# Altium PCB PCI_HIT_carrier.PcbDoc (part 2 of 2)
Units mm, origin at the board's own origin, x right, y up, seen from the top; angles counter-clockwise.
Board outline 51.3 x 50.35 mm, 4 copper layers (Top Layer, HV_vss, vdd_gnd, Bottom Layer); 9 components, 93 nets, 190 pads, 124 vias.
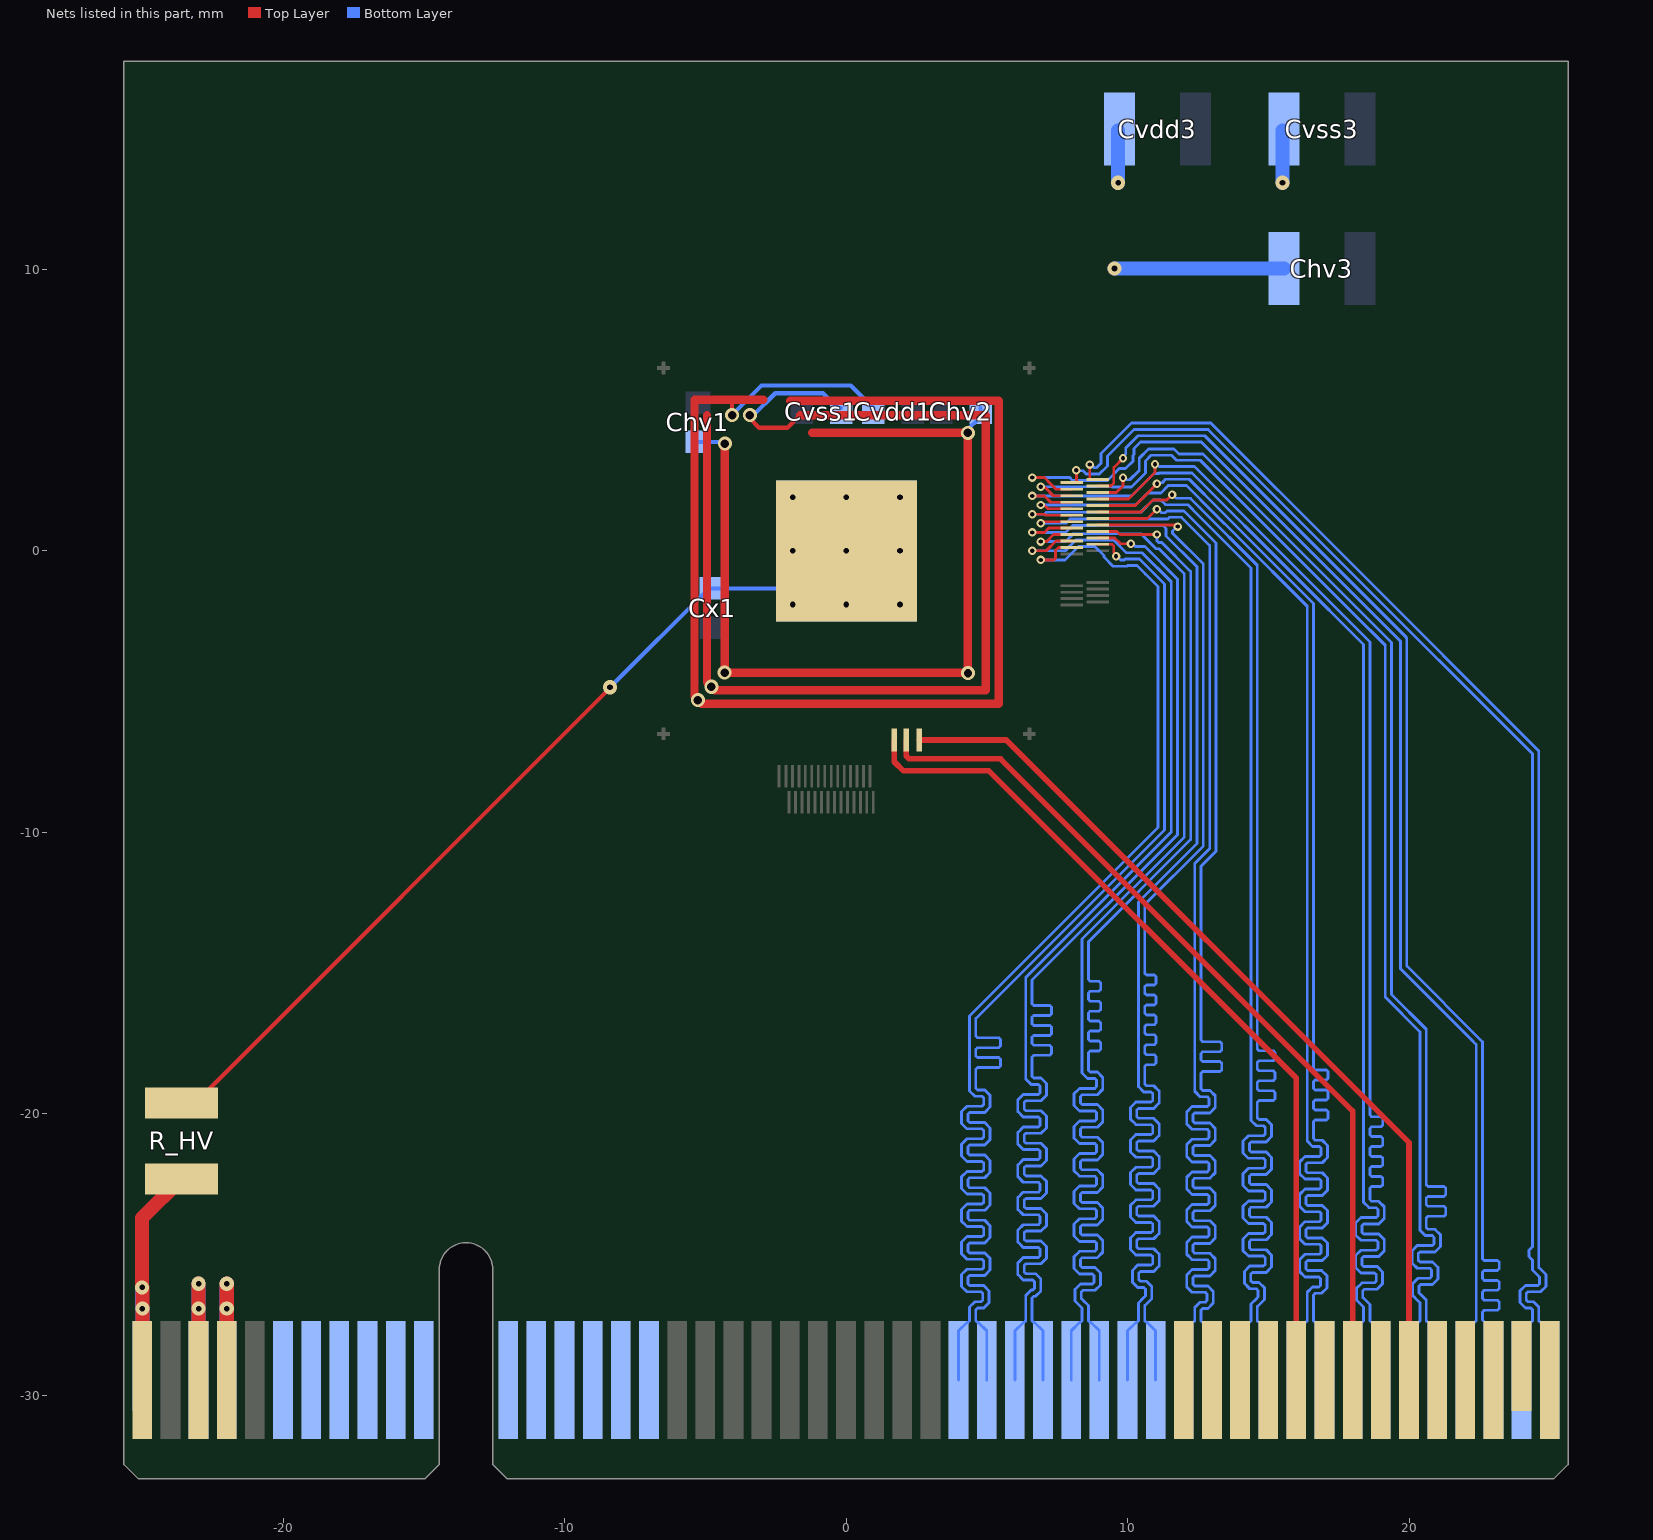
[diagram p4: the nets of this part, all layers, seen from the top]

## Via types
v1: diameter 0.3, hole 0.15, Top Layer to Bottom Layer, 88 vias
v2: diameter 0.5, hole 0.2, Top Layer to Bottom Layer, 22 vias
v3: diameter 0.5, hole 0.3, Top Layer to Bottom Layer, 10 vias
v4: diameter 3.4, hole 3.1, Top Layer to Bottom Layer, 4 vias

## Nets (pads, with @x,y where several pads share a name; then routed paths per layer and width w, separated by ;. In a path a pad name is that pad's centre, name@x,y a point inside that pad or via, vN(x,y) a via of type N, cw(c..) or ccw(c..) an arc to the next point about the centre after c; other vN are vias at no path point) (continued)
H6_N: pad.A28 pad.B15@8,0.12 | length 46
  Top Layer w0.1: v1(6.9,-0.319) 7.366,-0.319 7.425,-0.261 7.425,0.012 7.533,0.12 pad.B15@8,0.12
  Bottom Layer w0.1: pad.A28@3.985,-29.456 3.985,-27.706 4.285,-27.406 4.314,-27.406 4.372,-27.347 4.372,-27.189 4.372,-26.948 4.372,-26.867 4.564,-26.675 4.786,-26.675 4.846,-26.614 4.846,-26.381 4.786,-26.321 4.281,-26.321 4.089,-26.129 4.089,-25.709 4.281,-25.517 4.82,-25.517 4.88,-25.456 4.88,-25.223 4.82,-25.163 4.281,-25.163 4.089,-24.971 4.089,-24.551 4.281,-24.359 4.82,-24.359 4.88,-24.298 4.88,-24.065 4.82,-24.005 4.281,-24.005 4.089,-23.813 4.089,-23.393 4.281,-23.201 4.82,-23.201 4.88,-23.14 4.88,-22.907 4.82,-22.847 4.281,-22.847 4.089,-22.655 4.089,-22.235 4.281,-22.043 4.82,-22.043 4.88,-21.982 4.88,-21.749 4.82,-21.689 4.281,-21.689 4.089,-21.497 4.089,-21.077 4.281,-20.885 4.82,-20.885 4.88,-20.824 4.88,-20.591 4.82,-20.531 4.281,-20.531 4.089,-20.339 4.089,-19.919 4.281,-19.727 4.82,-19.727 4.88,-19.666 4.88,-19.433 4.82,-19.373 4.564,-19.373 4.372,-19.181 4.372,-18.972 4.372,-18.262 4.372,-16.52 11.072,-9.82 11.072,-1.268 10.619,-0.814 10.322,-0.517 9.997,-0.517 9.972,-0.542 9.472,-0.542 9.147,-0.218 9.147,-0.164 8.823,0.16 8.247,0.16 7.767,-0.319 v1(6.9,-0.319)
H6_P: pad.A29 pad.B15@8.925,0.235 | length 46
  Top Layer w0.1: pad.B15@8.925,0.235 9.441,0.235 9.5,0.176 9.5,-0.057 9.58,-0.137 v1(9.58,-0.191)
  Bottom Layer w0.1: pad.A29@4.985,-29.456 4.985,-27.706 4.685,-27.406 4.656,-27.406 4.597,-27.347 4.597,-27.189 4.597,-27.041 4.597,-26.96 4.658,-26.9 4.879,-26.9 5.071,-26.708 5.071,-26.288 4.879,-26.096 4.375,-26.096 4.314,-26.035 4.314,-25.802 4.375,-25.742 4.914,-25.742 5.105,-25.55 5.105,-25.13 4.914,-24.938 4.375,-24.938 4.314,-24.877 4.314,-24.644 4.375,-24.584 4.914,-24.584 5.105,-24.392 5.105,-23.972 4.914,-23.78 4.375,-23.78 4.314,-23.719 4.314,-23.486 4.375,-23.426 4.914,-23.426 5.105,-23.234 5.105,-22.814 4.914,-22.622 4.375,-22.622 4.314,-22.561 4.314,-22.328 4.375,-22.268 4.914,-22.268 5.105,-22.076 5.105,-21.656 4.914,-21.464 4.375,-21.464 4.314,-21.403 4.314,-21.17 4.375,-21.11 4.914,-21.11 5.105,-20.918 5.105,-20.498 4.914,-20.306 4.375,-20.306 4.314,-20.245 4.314,-20.012 4.375,-19.952 4.914,-19.952 5.105,-19.76 5.105,-19.34 4.914,-19.148 4.658,-19.148 4.597,-19.087 4.597,-18.972 4.597,-18.819 4.597,-18.415 4.658,-18.355 5.409,-18.355 5.47,-18.295 5.47,-18.061 5.409,-18.001 4.658,-18.001 4.597,-17.941 4.597,-17.707 4.658,-17.647 5.409,-17.647 5.47,-17.587 5.47,-17.353 5.409,-17.293 4.658,-17.293 4.597,-17.233 4.597,-16.972 4.597,-16.613 11.297,-9.913 11.297,-1.174 10.415,-0.292 9.904,-0.292 9.878,-0.317 9.739,-0.317 9.613,-0.191 v1(9.58,-0.191)
H7_N: pad.A30 pad.B7@8,0.35 | length 46
  Top Layer w0.1: v1(6.601,0.006) 7.1,0.006 7.444,0.35 pad.B7@8,0.35
  Bottom Layer w0.1: pad.A30@5.985,-29.456 5.985,-27.706 6.285,-27.406 6.314,-27.406 6.372,-27.347 6.372,-26.944 6.372,-26.85 6.372,-26.447 6.564,-26.255 6.622,-26.255 6.682,-26.195 6.682,-25.961 6.622,-25.901 6.281,-25.901 6.089,-25.709 6.089,-25.289 6.281,-25.097 6.82,-25.097 6.88,-25.037 6.88,-24.803 6.82,-24.743 6.281,-24.743 6.089,-24.551 6.089,-24.131 6.281,-23.939 6.82,-23.939 6.88,-23.879 6.88,-23.645 6.82,-23.585 6.281,-23.585 6.089,-23.393 6.089,-22.973 6.281,-22.781 6.82,-22.781 6.88,-22.721 6.88,-22.487 6.82,-22.427 6.281,-22.427 6.089,-22.235 6.089,-21.815 6.281,-21.623 6.82,-21.623 6.88,-21.563 6.88,-21.329 6.82,-21.269 6.281,-21.269 6.089,-21.077 6.089,-20.657 6.281,-20.465 6.82,-20.465 6.88,-20.405 6.88,-20.171 6.82,-20.111 6.281,-20.111 6.089,-19.919 6.089,-19.499 6.281,-19.307 6.82,-19.307 6.88,-19.247 6.88,-19.013 6.82,-18.953 6.564,-18.953 6.372,-18.761 6.372,-18.552 6.372,-15.156 11.538,-9.991 11.538,-1.097 10.508,-0.067 9.95,-0.067 9.498,0.385 8.153,0.385 7.774,0.006 v1(6.601,0.006)
H7_P: pad.A31 pad.B7@8.925,0.465 | length 46
  Top Layer w0.1: pad.B7@8.925,0.465 9.53,0.465 9.737,0.258 v1(10.107,0.258)
  Bottom Layer w0.1: pad.A31@6.985,-29.456 6.985,-27.706 6.685,-27.406 6.656,-27.406 6.597,-27.347 6.597,-26.944 6.598,-26.54 6.658,-26.48 6.715,-26.48 6.907,-26.288 6.907,-25.868 6.715,-25.676 6.375,-25.676 6.314,-25.616 6.314,-25.382 6.375,-25.322 6.914,-25.322 7.106,-25.13 7.106,-24.71 6.914,-24.518 6.375,-24.518 6.314,-24.458 6.314,-24.224 6.375,-24.164 6.914,-24.164 7.106,-23.972 7.106,-23.552 6.914,-23.36 6.375,-23.36 6.314,-23.3 6.314,-23.066 6.375,-23.006 6.914,-23.006 7.106,-22.814 7.106,-22.394 6.914,-22.202 6.375,-22.202 6.314,-22.142 6.314,-21.908 6.375,-21.848 6.914,-21.848 7.106,-21.656 7.106,-21.236 6.914,-21.044 6.375,-21.044 6.314,-20.984 6.314,-20.75 6.375,-20.69 6.914,-20.69 7.106,-20.498 7.106,-20.078 6.914,-19.886 6.375,-19.886 6.314,-19.826 6.314,-19.592 6.375,-19.532 6.914,-19.532 7.106,-19.34 7.106,-18.92 6.914,-18.728 6.658,-18.728 6.598,-18.668 6.598,-18.552 6.598,-18.383 6.598,-17.979 6.658,-17.918 7.225,-17.918 7.285,-17.858 7.285,-17.625 7.225,-17.564 6.658,-17.564 6.598,-17.504 6.598,-17.271 6.658,-17.21 7.225,-17.21 7.285,-17.15 7.285,-16.917 7.225,-16.856 6.658,-16.856 6.598,-16.796 6.598,-16.563 6.658,-16.502 7.225,-16.502 7.285,-16.442 7.285,-16.209 7.225,-16.148 6.658,-16.148 6.598,-16.088 6.598,-15.956 6.598,-15.249 11.763,-10.084 11.763,-1.004 10.601,0.158 10.261,0.158 10.161,0.258 v1(10.107,0.258)
H8_N: pad.A32 pad.B11@8,0.58 | length 46
  Top Layer w0.1: v1(6.9,0.331) 6.909,0.34 7.116,0.34 7.356,0.58 pad.B11@8,0.58
  Bottom Layer w0.1: v1(6.9,0.331) 7.781,0.331 8.06,0.61 10.467,0.61 10.998,0.079 11.108,0.079 12.005,-0.818 12.005,-10.16 8.372,-13.793 8.372,-17.971 8.372,-18.337 8.372,-18.546 8.564,-18.738 8.82,-18.738 8.88,-18.799 8.88,-19.032 8.82,-19.092 8.281,-19.092 8.089,-19.284 8.089,-19.704 8.281,-19.896 8.82,-19.896 8.88,-19.957 8.88,-20.19 8.82,-20.25 8.281,-20.25 8.089,-20.442 8.089,-20.862 8.281,-21.054 8.82,-21.054 8.88,-21.115 8.88,-21.348 8.82,-21.408 8.281,-21.408 8.089,-21.6 8.089,-22.02 8.281,-22.212 8.82,-22.212 8.88,-22.273 8.88,-22.506 8.82,-22.566 8.281,-22.566 8.089,-22.758 8.089,-23.178 8.281,-23.37 8.82,-23.37 8.88,-23.431 8.88,-23.664 8.82,-23.724 8.281,-23.724 8.089,-23.916 8.089,-24.336 8.281,-24.528 8.82,-24.528 8.88,-24.589 8.88,-24.822 8.82,-24.882 8.281,-24.882 8.089,-25.074 8.089,-25.494 8.281,-25.686 8.738,-25.686 8.799,-25.747 8.799,-25.98 8.738,-26.04 8.312,-26.04 8.12,-26.232 8.12,-26.652 8.312,-26.844 8.372,-26.905 8.372,-27.164 8.372,-27.347 8.314,-27.406 8.285,-27.406 7.985,-27.706 pad.A32@7.985,-29.456
H8_P: pad.A33 pad.B11@8.925,0.695 | length 46
  Top Layer w0.1: pad.B11@8.925,0.695 9.618,0.695 9.729,0.584 v1(11.03,0.584)
  Bottom Layer w0.1: 8.405,-26.619 8.345,-26.559 8.345,-26.326 8.405,-26.265 8.832,-26.265 9.024,-26.073 9.024,-25.653 8.832,-25.461 8.375,-25.461 8.314,-25.401 8.314,-25.168 8.375,-25.107 8.914,-25.107 9.105,-24.915 9.105,-24.495 8.914,-24.303 8.375,-24.303 8.314,-24.243 8.314,-24.01 8.375,-23.949 8.914,-23.949 9.105,-23.757 9.105,-23.337 8.914,-23.145 8.375,-23.145 8.314,-23.085 8.314,-22.852 8.375,-22.791 8.914,-22.791 9.105,-22.599 9.105,-22.179 8.914,-21.987 8.375,-21.987 8.314,-21.927 8.314,-21.694 8.375,-21.633 8.914,-21.633 9.105,-21.441 9.105,-21.021 8.914,-20.829 8.375,-20.829 8.314,-20.769 8.314,-20.536 8.375,-20.475 8.914,-20.475 9.105,-20.283 9.105,-19.863 8.914,-19.671 8.375,-19.671 8.314,-19.611 8.314,-19.378 8.375,-19.317 8.914,-19.317 9.105,-19.125 9.105,-18.705 8.914,-18.513 8.658,-18.513 8.597,-18.453 8.597,-18.337 8.597,-18.231 8.597,-17.827 8.658,-17.767 8.972,-17.767 9.032,-17.707 9.032,-17.473 8.972,-17.413 8.658,-17.413 8.597,-17.353 8.597,-17.119 8.658,-17.059 8.972,-17.059 9.032,-16.999 9.032,-16.765 8.972,-16.705 8.658,-16.705 8.597,-16.645 8.597,-16.411 8.658,-16.351 8.972,-16.351 9.032,-16.291 9.032,-16.057 8.972,-15.997 8.658,-15.997 8.597,-15.937 8.597,-15.703 8.658,-15.643 8.972,-15.643 9.032,-15.583 9.032,-15.349 8.972,-15.289 8.658,-15.289 8.597,-15.229 8.597,-15.127 8.597,-13.886 12.23,-10.253 12.23,-0.725 11.201,0.304 11.092,0.304 11.033,0.363 11.033,0.581 v1(11.03,0.584) ; 8.406,-26.619 8.597,-26.811 8.597,-27.164 8.597,-27.347 8.656,-27.406 8.685,-27.406 8.985,-27.706 pad.A33@8.985,-29.456
H9_N: pad.A34 pad.B15@8,0.81 | length 46
  Top Layer w0.1: v1(6.601,0.656) 7.035,0.656 7.189,0.81 pad.B15@8,0.81
  Bottom Layer w0.1: v1(6.601,0.656) 7.788,0.656 8.041,0.909 11.244,0.909 11.355,0.798 11.355,0.536 12.455,-0.563 12.455,-10.392 10.372,-12.474 10.372,-18.824 10.372,-19.033 10.564,-19.225 10.826,-19.225 10.886,-19.285 10.886,-19.519 10.826,-19.579 10.281,-19.579 10.089,-19.771 10.089,-20.191 10.281,-20.383 10.826,-20.383 10.886,-20.443 10.886,-20.677 10.826,-20.737 10.281,-20.737 10.089,-20.929 10.089,-21.349 10.281,-21.541 10.826,-21.541 10.886,-21.601 10.886,-21.835 10.826,-21.895 10.281,-21.895 10.089,-22.087 10.089,-22.507 10.281,-22.699 10.826,-22.699 10.886,-22.759 10.886,-22.993 10.826,-23.053 10.281,-23.053 10.089,-23.245 10.089,-23.665 10.281,-23.857 10.826,-23.857 10.886,-23.917 10.886,-24.151 10.826,-24.211 10.281,-24.211 10.089,-24.403 10.089,-24.823 10.281,-25.015 10.826,-25.015 10.886,-25.075 10.886,-25.309 10.826,-25.369 10.352,-25.369 10.16,-25.561 10.16,-25.981 10.352,-26.173 10.564,-26.173 10.625,-26.233 10.625,-26.467 10.564,-26.527 ; pad.A34@9.985,-29.456 9.985,-27.706 10.285,-27.406 10.314,-27.406 10.372,-27.347 10.372,-27.14 10.372,-26.719 10.564,-26.527
H9_P: pad.A35 pad.B15@8.925,0.925 | length 46
  Top Layer w0.1: pad.B15@8.925,0.925 11.756,0.925 11.77,0.912 v1(11.77,0.864)
  Bottom Layer w0.1: pad.A35@10.985,-29.456 10.985,-27.706 10.685,-27.406 10.656,-27.406 10.597,-27.347 10.597,-27.14 10.597,-26.812 10.658,-26.752 10.85,-26.56 10.85,-26.14 10.658,-25.948 10.445,-25.948 10.385,-25.888 10.385,-25.654 10.445,-25.594 10.919,-25.594 11.111,-25.402 11.111,-24.982 10.919,-24.79 10.375,-24.79 10.314,-24.73 10.314,-24.496 10.375,-24.436 10.919,-24.436 11.111,-24.244 11.111,-23.824 10.919,-23.632 10.375,-23.632 10.314,-23.572 10.314,-23.338 10.375,-23.278 10.919,-23.278 11.111,-23.086 11.111,-22.666 10.919,-22.474 10.375,-22.474 10.314,-22.414 10.314,-22.18 10.375,-22.12 10.919,-22.12 11.111,-21.928 11.111,-21.508 10.919,-21.316 10.375,-21.316 10.314,-21.256 10.314,-21.022 10.375,-20.962 10.919,-20.962 11.111,-20.77 11.111,-20.35 10.919,-20.158 10.375,-20.158 10.314,-20.098 10.314,-19.864 10.375,-19.804 10.919,-19.804 11.111,-19.612 11.111,-19.192 10.919,-19 10.658,-19 10.597,-18.94 10.597,-18.824 10.597,-18.715 10.597,-18.311 10.658,-18.251 10.939,-18.251 10.999,-18.191 10.999,-17.957 10.939,-17.897 10.658,-17.897 10.597,-17.837 10.597,-17.603 10.658,-17.543 10.939,-17.543 10.999,-17.483 10.999,-17.249 10.939,-17.189 10.658,-17.189 10.597,-17.129 10.597,-16.895 10.658,-16.835 10.939,-16.835 10.999,-16.775 10.999,-16.541 10.939,-16.481 10.658,-16.481 10.597,-16.421 10.597,-16.187 10.658,-16.127 10.939,-16.127 10.999,-16.067 10.999,-15.833 10.939,-15.773 10.658,-15.773 10.597,-15.713 10.597,-15.479 10.658,-15.419 10.939,-15.419 10.999,-15.359 10.999,-15.125 10.939,-15.065 10.658,-15.065 10.597,-15.005 10.597,-14.782 10.597,-12.567 12.68,-10.485 12.68,-0.47 11.58,0.629 11.58,0.712 11.732,0.864 v1(11.77,0.864)
H10_N: pad.A36 pad.B7@8,1.04 | length 46
  Top Layer w0.1: v1(6.9,0.981) 6.954,0.981 7.013,1.04 pad.B7@8,1.04
  Bottom Layer w0.1: v1(6.9,0.981) 7.795,0.981 7.948,1.134 11.423,1.134 11.482,1.194 11.9,1.194 12.905,0.189 12.905,-10.578 12.372,-11.11 12.372,-18.223 12.372,-18.594 12.372,-18.988 12.372,-19.197 12.564,-19.389 12.82,-19.389 12.88,-19.449 12.88,-19.682 12.82,-19.743 12.281,-19.743 12.089,-19.935 12.089,-20.355 12.281,-20.547 12.82,-20.547 12.88,-20.607 12.88,-20.84 12.82,-20.901 12.281,-20.901 12.089,-21.093 12.089,-21.513 12.281,-21.705 12.82,-21.705 12.88,-21.765 12.88,-21.998 12.82,-22.059 12.281,-22.059 12.089,-22.251 12.089,-22.671 12.281,-22.863 12.82,-22.863 12.88,-22.923 12.88,-23.156 12.82,-23.217 12.281,-23.217 12.089,-23.409 12.089,-23.829 12.281,-24.021 12.82,-24.021 12.88,-24.081 12.88,-24.314 12.82,-24.375 12.281,-24.375 12.089,-24.567 12.089,-24.987 12.281,-25.179 12.82,-25.179 12.88,-25.239 12.88,-25.472 12.82,-25.533 12.281,-25.533 12.089,-25.725 12.089,-26.145 12.281,-26.337 12.746,-26.337 12.806,-26.397 12.806,-26.63 12.746,-26.691 12.564,-26.691 12.372,-26.883 12.372,-27.168 12.372,-27.347 12.314,-27.406 12.285,-27.406 11.985,-27.706 pad.A36@11.985,-29.456
H10_P: pad.A37 pad.B7@8.925,1.155 | length 46
  Top Layer w0.1: pad.B7@8.925,1.155 10.701,1.155 v1(11.03,1.484)
  Bottom Layer w0.1: v1(11.03,1.484) 11.064,1.484 11.189,1.359 11.329,1.359 11.389,1.419 11.993,1.419 13.13,0.282 13.13,-10.671 12.597,-11.204 12.597,-17.325 12.597,-17.375 12.658,-17.435 13.273,-17.435 13.333,-17.495 13.333,-17.729 13.273,-17.789 12.658,-17.789 12.597,-17.849 12.597,-18.083 12.658,-18.143 13.273,-18.143 13.333,-18.203 13.333,-18.437 13.273,-18.497 12.658,-18.497 12.597,-18.557 12.597,-18.647 12.597,-18.697 12.597,-18.988 12.597,-19.103 12.658,-19.164 12.914,-19.164 13.105,-19.356 13.105,-19.776 12.914,-19.968 12.375,-19.968 12.314,-20.028 12.314,-20.261 12.375,-20.322 12.914,-20.322 13.105,-20.514 13.105,-20.934 12.914,-21.126 12.375,-21.126 12.314,-21.186 12.314,-21.419 12.375,-21.48 12.914,-21.48 13.105,-21.672 13.105,-22.092 12.914,-22.284 12.375,-22.284 12.314,-22.344 12.314,-22.577 12.375,-22.638 12.914,-22.638 13.105,-22.83 13.105,-23.25 12.914,-23.442 12.375,-23.442 12.314,-23.502 12.314,-23.735 12.375,-23.796 12.914,-23.796 13.105,-23.988 13.105,-24.408 12.914,-24.6 12.375,-24.6 12.314,-24.66 12.314,-24.893 12.375,-24.954 12.914,-24.954 13.105,-25.146 13.105,-25.566 12.914,-25.758 12.375,-25.758 12.314,-25.818 12.314,-26.051 12.375,-26.112 12.839,-26.112 13.031,-26.304 13.031,-26.724 12.839,-26.916 12.658,-26.916 12.597,-26.976 12.597,-27.168 12.597,-27.347 12.656,-27.406 12.685,-27.406 12.985,-27.706 pad.A37@12.985,-29.456
H11_N: pad.A38 pad.B11@8,1.27 | length 46
  Top Layer w0.1: v1(6.601,1.306) 7.035,1.306 7.071,1.27 pad.B11@8,1.27
  Bottom Layer w0.1: v1(6.601,1.306) 7.035,1.306 7.104,1.375 10.455,1.375 10.888,1.809 11.165,1.809 11.33,1.644 12.126,1.644 12.488,1.282 14.372,-0.603 14.372,-15.475 14.372,-19.823 14.372,-20.02 14.372,-20.229 14.564,-20.421 14.82,-20.421 14.88,-20.481 14.88,-20.715 14.82,-20.775 14.281,-20.775 14.089,-20.967 14.089,-21.387 14.281,-21.579 14.82,-21.579 14.88,-21.639 14.88,-21.873 14.82,-21.933 14.281,-21.933 14.089,-22.125 14.089,-22.545 14.281,-22.737 14.82,-22.737 14.88,-22.797 14.88,-23.031 14.82,-23.091 14.281,-23.091 14.089,-23.283 14.089,-23.703 14.281,-23.895 14.82,-23.895 14.88,-23.955 14.88,-24.189 14.82,-24.249 14.281,-24.249 14.089,-24.441 14.089,-24.861 14.281,-25.053 14.82,-25.053 14.88,-25.113 14.88,-25.347 14.82,-25.407 14.33,-25.407 14.138,-25.599 14.138,-26.019 14.33,-26.211 14.564,-26.211 14.625,-26.271 14.625,-26.505 14.564,-26.565 14.372,-26.757 14.372,-27.067 14.372,-27.347 14.314,-27.406 14.285,-27.406 13.985,-27.706 pad.A38@13.985,-29.456
H11_P: pad.A39 pad.B11@8.925,1.385 | length 46
  Top Layer w0.1: pad.B11@8.925,1.385 10.472,1.385 10.896,1.809 11.382,1.809 v1(11.568,1.995)
  Bottom Layer w0.1: v1(11.568,1.995) 11.6,1.995 11.726,1.869 12.219,1.869 12.567,1.52 14.597,-0.51 14.597,-15.568 14.597,-17.649 14.597,-17.699 14.658,-17.759 15.163,-17.759 15.223,-17.819 15.223,-18.053 15.163,-18.113 14.658,-18.113 14.597,-18.173 14.597,-18.407 14.658,-18.467 15.163,-18.467 15.223,-18.527 15.223,-18.761 15.163,-18.821 14.658,-18.821 14.597,-18.881 14.597,-19.115 14.658,-19.175 15.163,-19.175 15.223,-19.235 15.223,-19.469 15.163,-19.529 14.658,-19.529 14.597,-19.589 14.597,-19.753 14.597,-20.02 14.597,-20.136 14.658,-20.196 14.914,-20.196 15.105,-20.388 15.105,-20.808 14.914,-21 14.375,-21 14.314,-21.06 14.314,-21.294 14.375,-21.354 14.914,-21.354 15.105,-21.546 15.105,-21.966 14.914,-22.158 14.375,-22.158 14.314,-22.218 14.314,-22.452 14.375,-22.512 14.914,-22.512 15.105,-22.704 15.105,-23.124 14.914,-23.316 14.375,-23.316 14.314,-23.376 14.314,-23.61 14.375,-23.67 14.914,-23.67 15.105,-23.862 15.105,-24.282 14.914,-24.474 14.375,-24.474 14.314,-24.534 14.314,-24.768 14.375,-24.828 14.914,-24.828 15.105,-25.02 15.105,-25.44 14.914,-25.632 14.423,-25.632 14.363,-25.692 14.363,-25.926 14.423,-25.986 14.658,-25.986 14.85,-26.178 14.85,-26.598 14.658,-26.79 14.597,-26.85 14.597,-27.067 14.597,-27.347 14.656,-27.406 14.685,-27.406 14.985,-27.706 pad.A39@14.985,-29.456
H12_N: pad.A40 pad.B15@8,1.5 | length 46
  Top Layer w0.1: v1(6.9,1.631) 7.025,1.631 7.156,1.5 pad.B15@8,1.5
  Bottom Layer w0.1: v1(6.9,1.631) 10.275,1.631 10.703,2.058 11.172,2.058 11.433,2.32 12.086,2.32 13.065,1.341 13.856,0.55 16.372,-1.967 16.372,-20.759 16.372,-20.969 16.563,-21.159 16.811,-21.159 16.864,-21.212 16.864,-21.46 16.811,-21.513 16.29,-21.513 16.105,-21.698 16.105,-22.132 16.29,-22.317 16.811,-22.317 16.864,-22.37 16.864,-22.618 16.811,-22.671 16.29,-22.671 16.105,-22.856 16.105,-23.29 16.29,-23.475 16.811,-23.475 16.864,-23.528 16.864,-23.776 16.811,-23.829 16.29,-23.829 16.105,-24.014 16.105,-24.448 16.29,-24.633 16.811,-24.633 16.864,-24.686 16.864,-24.934 16.811,-24.987 16.29,-24.987 16.105,-25.172 16.105,-25.606 16.29,-25.791 16.791,-25.791 16.844,-25.844 16.844,-26.092 16.791,-26.145 16.563,-26.145 16.372,-26.335 16.372,-26.988 16.372,-27.347 16.314,-27.406 16.285,-27.406 15.985,-27.706 pad.A40@15.985,-29.456
H12_P: pad.A41 pad.B15@8.925,1.615 | length 46
  Top Layer w0.1: pad.B15@8.925,1.615 10.261,1.615 v1@11.034,2.388 ; v1(11.032,2.388) v1@11.034,2.388 ; v1@11.057,2.411 v1@11.034,2.388
  Bottom Layer w0.1: v1(11.032,2.388) 11.068,2.424 11.22,2.424 11.34,2.545 12.179,2.545 13.29,1.434 16.597,-1.873 16.597,-18.334 16.597,-18.384 16.658,-18.445 17.053,-18.445 17.113,-18.505 17.113,-18.738 17.053,-18.799 16.658,-18.799 16.597,-18.859 16.597,-19.092 16.658,-19.153 17.053,-19.153 17.113,-19.213 17.113,-19.446 17.053,-19.507 16.658,-19.507 16.597,-19.567 16.597,-19.8 16.658,-19.861 17.053,-19.861 17.113,-19.921 17.113,-20.154 17.053,-20.215 16.658,-20.215 16.597,-20.275 16.597,-20.453 16.597,-20.759 16.597,-20.875 16.656,-20.934 16.905,-20.934 17.089,-21.119 17.089,-21.553 16.905,-21.738 16.384,-21.738 16.33,-21.791 16.33,-22.039 16.384,-22.092 16.905,-22.092 17.089,-22.277 17.089,-22.711 16.905,-22.896 16.384,-22.896 16.33,-22.949 16.33,-23.197 16.384,-23.25 16.905,-23.25 17.089,-23.435 17.089,-23.869 16.905,-24.054 16.384,-24.054 16.33,-24.107 16.33,-24.355 16.384,-24.408 16.905,-24.408 17.089,-24.593 17.089,-25.027 16.905,-25.212 16.384,-25.212 16.33,-25.265 16.33,-25.513 16.384,-25.566 16.884,-25.566 17.069,-25.751 17.069,-26.185 16.884,-26.37 16.656,-26.37 16.597,-26.429 16.597,-26.988 16.597,-27.347 16.656,-27.406 16.685,-27.406 16.985,-27.706 pad.A41@16.985,-29.456
H13_N: pad.A42 pad.B7@8,1.73 | length 46
  Top Layer w0.1: v1(6.601,1.956) 7.035,1.956 7.261,1.73 pad.B7@8,1.73
  Bottom Layer w0.1: v1(6.601,1.956) 10.131,1.956 10.927,2.752 11.098,2.752 11.116,2.77 12.274,2.77 15.981,-0.937 18.372,-3.328 18.372,-20.943 18.372,-22.71 ; pad.A42@17.985,-29.456 17.985,-27.706 18.285,-27.406 18.314,-27.406 18.372,-27.347 18.372,-27.179 18.372,-26.866 18.312,-26.805 18.12,-26.613 18.12,-26.193 18.312,-26.001 18.763,-26.001 18.823,-25.941 18.823,-25.708 18.763,-25.647 18.281,-25.647 18.089,-25.455 18.089,-25.035 18.281,-24.843 18.82,-24.843 18.88,-24.783 18.88,-24.55 18.82,-24.489 18.281,-24.489 18.089,-24.297 18.089,-23.877 18.281,-23.685 18.82,-23.685 18.88,-23.625 18.88,-23.392 18.82,-23.331 18.564,-23.331 18.372,-23.139 18.372,-22.93 18.372,-22.782 18.372,-22.711
H13_P: pad.A43 pad.B7@8.925,1.845 | length 46
  Top Layer w0.1: pad.B7@8.925,1.845 10.024,1.845 10.963,2.784 v1(10.963,3.077)
  Bottom Layer w0.1: v1(10.963,3.077) 11.017,3.077 11.099,2.995 12.368,2.995 16.06,-0.698 18.597,-3.235 18.597,-19.99 18.597,-20.04 18.658,-20.1 18.992,-20.1 19.052,-20.161 19.052,-20.394 18.992,-20.454 18.658,-20.454 18.597,-20.515 18.597,-20.748 18.658,-20.808 18.992,-20.808 19.052,-20.869 19.052,-21.102 18.992,-21.162 18.658,-21.162 18.597,-21.223 18.597,-21.456 18.658,-21.516 18.992,-21.516 19.052,-21.577 19.052,-21.81 18.992,-21.87 18.658,-21.87 18.597,-21.931 18.597,-22.164 18.658,-22.224 18.992,-22.224 19.052,-22.285 19.052,-22.518 18.992,-22.578 18.658,-22.578 18.597,-22.639 18.597,-22.651 18.597,-22.701 18.597,-22.93 18.597,-23.046 18.658,-23.106 18.914,-23.106 19.105,-23.298 19.105,-23.718 18.914,-23.91 18.375,-23.91 18.314,-23.971 18.314,-24.204 18.375,-24.264 18.914,-24.264 19.105,-24.456 19.105,-24.876 18.914,-25.068 18.375,-25.068 18.314,-25.129 18.314,-25.362 18.375,-25.422 18.856,-25.422 19.048,-25.614 19.048,-26.034 18.856,-26.226 18.405,-26.226 18.345,-26.287 18.345,-26.52 18.405,-26.58 18.597,-26.772 18.597,-27.179 18.597,-27.347 18.656,-27.406 18.685,-27.406 18.985,-27.706 pad.A43@18.985,-29.456
H14_N: pad.A44 pad.B11@8,1.96 | length 46
  Top Layer w0.1: v1(6.9,2.281) 6.938,2.243 7.066,2.243 7.349,1.96 pad.B11@8,1.96
  Bottom Layer w0.1: v1(6.9,2.281) 9.438,2.281 9.444,2.275 10.132,2.275 10.626,2.769 10.626,3.199 10.828,3.402 11.542,3.402 11.724,3.22 12.569,3.22 13.365,2.424 18.025,-2.237 19.14,-3.352 19.14,-15.852 20.372,-17.084 20.372,-23.924 20.372,-24.134 20.564,-24.326 20.818,-24.326 20.878,-24.386 20.878,-24.619 20.818,-24.68 20.279,-24.68 20.087,-24.872 20.087,-25.292 20.279,-25.484 20.731,-25.484 20.791,-25.544 20.791,-25.777 20.731,-25.838 20.312,-25.838 20.12,-26.03 20.12,-26.45 20.312,-26.642 20.372,-26.702 20.372,-27.092 20.372,-27.347 20.314,-27.406 20.285,-27.406 19.985,-27.706 pad.A44@19.985,-29.456
H14_P: pad.A45 pad.B11@8.925,2.075 | length 46
  Top Layer w0.1: pad.B11@8.925,2.075 9.588,2.075 9.825,2.313 v1(9.825,2.6)
  Bottom Layer w0.1: v1(9.825,2.6) 9.88,2.6 9.951,2.528 10.067,2.528 10.401,2.862 10.401,3.292 10.735,3.627 11.635,3.627 11.817,3.445 12.662,3.445 18.105,-1.998 19.365,-3.258 19.365,-15.759 20.597,-16.991 20.597,-22.466 20.597,-22.516 20.658,-22.576 21.229,-22.576 21.289,-22.636 21.289,-22.87 21.229,-22.93 20.658,-22.93 20.597,-22.99 20.597,-23.224 20.658,-23.284 21.229,-23.284 21.289,-23.344 21.289,-23.578 21.229,-23.638 20.658,-23.638 20.597,-23.698 20.597,-23.809 20.597,-23.924 20.597,-24.04 20.658,-24.101 20.911,-24.101 21.103,-24.293 21.103,-24.713 20.911,-24.905 20.373,-24.905 20.312,-24.965 20.312,-25.198 20.373,-25.259 20.824,-25.259 21.016,-25.451 21.016,-25.871 20.824,-26.063 20.405,-26.063 20.345,-26.123 20.345,-26.356 20.405,-26.417 20.597,-26.609 20.597,-27.092 20.597,-27.347 20.656,-27.406 20.685,-27.406 20.985,-27.706 pad.A45@20.985,-29.456
H15_N: pad.A46 pad.B15@8,2.19 | length 46
  Top Layer w0.1: v1(6.601,2.606) 7.035,2.606 7.242,2.398 7.45,2.19 pad.B15@8,2.19
  Bottom Layer w0.1: v1(6.601,2.606) 7.933,2.606 8.033,2.507 9.273,2.507 9.691,2.925 9.917,2.925 10.176,3.184 10.176,3.386 10.221,3.43 10.221,3.64 10.448,3.867 12.608,3.867 19.684,-3.21 19.684,-14.844 22.179,-17.339 22.373,-17.533 22.373,-27.347 22.314,-27.406 22.285,-27.406 21.985,-27.706 pad.A46@21.985,-29.456
H15_P: pad.A47 pad.B15@8.925,2.305 | length 46
  Top Layer w0.1: pad.B15@8.925,2.305 9.392,2.305 9.5,2.413 9.5,2.968 v1(9.825,3.294)
  Bottom Layer w0.1: v1(9.825,3.294) 9.825,3.348 9.925,3.448 9.925,3.663 10.355,4.092 12.73,4.092 19.889,-3.067 19.889,-3.096 19.909,-3.116 19.909,-14.751 22.598,-17.44 22.598,-25.095 22.598,-25.145 22.658,-25.205 23.13,-25.205 23.19,-25.265 23.19,-25.499 23.13,-25.559 22.658,-25.559 22.598,-25.619 22.598,-25.853 22.658,-25.913 23.13,-25.913 23.19,-25.973 23.19,-26.207 23.13,-26.267 22.658,-26.267 22.598,-26.327 22.598,-26.561 22.658,-26.621 23.13,-26.621 23.19,-26.681 23.19,-26.915 23.13,-26.975 22.658,-26.975 22.598,-27.035 22.598,-27.136 22.598,-27.319 22.985,-27.706 pad.A47@22.985,-29.456
H16_N: pad.A48 pad.B7@8,2.427 | length 46
  Top Layer w0.1: pad.B7@8,2.427 8.168,2.427 8.168,2.866 v1(8.167,2.867)
  Bottom Layer w0.1: v1(8.167,2.867) 8.187,2.847 8.407,2.847 8.522,2.732 8.982,2.732 9.272,3.022 9.272,3.374 10.216,4.317 12.852,4.317 17.699,-0.53 24.372,-7.204 24.372,-24.313 24.372,-24.717 24.312,-24.777 24.31,-24.777 24.249,-24.838 24.249,-25.071 24.31,-25.131 24.312,-25.131 24.372,-25.192 24.372,-25.26 24.372,-25.326 24.372,-25.547 24.564,-25.739 24.625,-25.799 24.625,-26.033 24.565,-26.093 24.12,-26.093 23.928,-26.285 23.928,-26.705 24.12,-26.897 24.312,-26.897 24.372,-26.957 24.372,-27.073 24.372,-27.347 24.314,-27.406 24.285,-27.406 23.985,-27.706 pad.A48@23.985,-29.456
H16_P: pad.A49 pad.B15@8.925,2.535 | length 46
  Top Layer w0.1: v1(8.647,3.067) 8.647,2.867 8.647,2.535 pad.B15@8.925,2.535
  Bottom Layer w0.1: v1(8.647,3.067) 8.696,3.067 8.806,2.957 8.889,2.957 9.047,3.115 9.047,3.467 10.122,4.542 12.945,4.542 17.779,-0.292 24.597,-7.11 24.597,-25.326 24.598,-25.454 24.658,-25.514 ; 24.658,-25.514 24.85,-25.706 24.85,-26.126 24.658,-26.318 24.213,-26.318 24.153,-26.378 24.153,-26.612 24.213,-26.672 24.406,-26.672 24.598,-26.864 24.598,-27.073 24.597,-27.347 24.656,-27.406 24.685,-27.406 24.985,-27.706 pad.A49@24.985,-29.456
HV: Chv1.1 Chv2.2 Chv3.2 pad.A1 pad.B1 R_HV.2 | length 54.7
  Top Layer w0.3: v3(-4.318,3.81) -4.318,-4.318 v3(-4.325,-4.325) 4.311,-4.325 4.318,-4.318 4.318,-4.074 ; -1.206,4.191 v3(4.318,4.191) 4.318,-4.074 ; v3(4.32,-4.339) 4.32,-4.076 4.318,-4.074
  Top Layer w0.5: pad.B1@-25.015,-29.456 v2(-25.015,-26.916) -25.015,-26.166 v2(-25.019,-26.162) -25.019,-23.702 R_HV.2@-23.622,-22.305
  Bottom Layer w0.15: Chv1.1@-5.275,3.872 -4.38,3.872 v3(-4.318,3.81) ; v3@4.255,4.255 4.764,4.764 Chv2.2@4.764,4.953 Chv2.2@4.764,5.08 ; v2(9.525,10.033) 14.605,10.033
  Bottom Layer w0.5: v2@-25.019,-26.916 v2(-25.019,-26.162) ; pad.A1@-25.015,-28.956 v2(-25.015,-26.916) ; v2(9.525,10.033) Chv3.2@15.541,10.033
"right 9": pad.B36
"right 10": pad.B37
"right 11": pad.B38
"right 12": pad.B39
"right 13": pad.B13@1.7,-6.717 pad.B40 | length 30.4
  Top Layer w0.2: pad.B13@1.7,-6.717 1.7,-7.487 2.026,-7.813 5.063,-7.813 15.985,-18.735 pad.B40@15.985,-29.456
"right 14": pad.B41
"right 15": pad.B13@2.125,-6.717 pad.B42 | length 31.2
  Top Layer w0.2: pad.B13@2.125,-6.717 2.125,-7.281 2.174,-7.33 2.233,-7.389 5.479,-7.389 17.985,-19.895 pad.B42@17.985,-29.456
"right 16": pad.B43
"right 17": pad.B13@2.585,-6.717 pad.B44 | length 31.8
  Top Layer w0.2: pad.B13@2.585,-6.717 5.679,-6.717 19.985,-21.023 pad.B44@19.985,-29.456
"right 18": pad.B45
"right 19": pad.B46
"right 20": pad.B47
"right 21": pad.B48
"right 22": pad.B49
"top 1": pad.A6
"top 2": pad.A7
"top 3": pad.A8
"top 4": pad.A9
"top 5": pad.A10
"top 6": pad.A11
"top 7": pad.A12
"top 8": pad.A13
"top 9": pad.A14
"top 10": pad.A15
"top 11": pad.A16
"top 12": pad.A17
vdd: Cvdd1.1 Cvdd3.2 pad.A3 pad.B3 | length 57
  Top Layer w0.15: v3@-4.064,4.953 -4.064,5.371
  Top Layer w0.3: -2.958,5.371 -4.064,5.371 -5.397,5.371 -5.397,-5.178 v3(-5.275,-5.3) -5.148,-5.427 5.419,-5.427 5.419,5.334 -1.995,5.334
  Top Layer w0.5: pad.B3@-23.015,-29.456 v2(-23.015,-26.916) v2(-23.015,-26.035)
  Bottom Layer w0.15: v3(-4.064,4.826) -4.064,4.827 -3.013,5.878 0.153,5.878 Cvdd1.1@0.951,5.08 ; Cvdd3.2@9.652,14.939 Cvdd3.2@9.699,14.986
  Bottom Layer w0.5: pad.A3@-23.015,-29.456 v2(-23.015,-26.916) v2(-23.015,-26.035) ; v2(9.652,13.081) Cvdd3.2@9.652,14.939
vss: Cvss1.1 Cvss3.2 pad.A4 pad.B4 | length 50.5
  Top Layer w0.15: v3@-3.429,4.699 -3.106,4.376 -2.1,4.376 -1.65,4.826
  Top Layer w0.3: -4.953,4.826 -4.953,-4.672 v3(-4.8,-4.825) -4.672,-4.953 -4.347,-4.953 4.953,-4.953 4.953,4.826 -1.65,4.826
  Top Layer w0.5: pad.B4@-22.015,-29.456 v2(-22.015,-26.916) v2(-22.015,-26.035)
  Bottom Layer w0.15: v3(-3.429,4.826) -3.303,4.826 -2.526,5.603 -0.828,5.603 -0.305,5.08 Cvss1.1@-0.189,5.08 ; Cvss3.2@15.494,14.939 Cvss3.2@15.541,14.986
  Bottom Layer w0.5: pad.A4@-22.015,-29.456 v2(-22.015,-26.916) v2(-22.015,-26.035) ; v2(15.494,13.081) Cvss3.2@15.494,14.939
x: Cx1.2 pad.X R_HV.1 | length 34.3
  Top Layer w0.15: R_HV.1@-23.622,-19.605 -23.13,-19.605 -8.4,-4.875 v2(-8.4,-4.844)
  Bottom Layer w0.15: v2(-8.4,-4.844) -4.888,-1.332 Cx1.2@-4.767,-1.332 -2.478,-1.332 v2(-1.905,-1.905) v2(0,0) v2(1.905,0) pad.X@2.032,0
  other v2: 0,-1.905 1.905,-1.905 -1.905,0 -1.905,1.905 0,1.905 1.905,1.905
copper on no net:
  other v4: -23,-13 22,-13 -23,14 22,14

## Polygon pours and split planes (outlines as drawn)
HV on HV_vss (split plane): 10.898,8.936 5.1,3.139 5.076,3.107 5.061,3.071 5.056,3.032 5.056,-4.347 4.601,-4.802 4.177,-4.802 3.901,-4.526 3.901,-4.06 4.425,-3.536 4.449,-3.505 4.464,-3.468 4.469,-3.429 4.469,3.302 4.464,3.341 4.449,3.378 4.425,3.409 3.784,4.05 3.784,5.086 3.779,5.125 3.764,5.161 3.74,5.193 2.984,5.949 2.952,5.973 2.916,5.988 2.877,5.993 -3.556,5.993 -3.595,5.988 -3.632,5.973 -3.663,5.949 -4.171,5.441 -4.195,5.41 -4.21,5.373 -4.215,5.334 -4.215,4.445 -4.21,4.406 -4.195,4.369 -4.171,4.338 -3.834,4.001 -3.834,3.659 -4.679,2.814 -4.703,2.783 -4.718,2.746 -4.723,2.707 -4.723,-2.985 -24.11,-22.372 -24.134,-22.403 -24.149,-22.44 -24.154,-22.479 -24.154,-32.446 -24.954,-32.446 -25.155,-32.245 -25.155,-22.031 -25.155,16.889 10.898,16.889
vss on HV_vss (split plane): 25.125,-20.206 25.125,-32.245 24.924,-32.446 -11.854,-32.446 -12.055,-32.245 -12.055,-25.527 -12.055,-25.523 -12.064,-25.363 -12.091,-25.202 -12.137,-25.045 -12.199,-24.893 -12.279,-24.75 -12.373,-24.617 -12.482,-24.494 -12.605,-24.385 -12.738,-24.291 -12.881,-24.211 -13.033,-24.149 -13.19,-24.103 -13.352,-24.076 -13.515,-24.067 -13.679,-24.076 -13.84,-24.103 -13.997,-24.149 -14.149,-24.211 -14.292,-24.291 -14.425,-24.385 -14.548,-24.494 -14.657,-24.617 -14.751,-24.75 -14.831,-24.893 -14.893,-25.045 -14.939,-25.202 -14.966,-25.363 -14.975,-25.523 -14.975,-25.527 -14.975,-32.245 -15.176,-32.446 -23.852,-32.446 -23.852,-22.542 -4.465,-3.155 -4.441,-3.124 -4.426,-3.087 -4.421,-3.048 -4.421,2.644 -3.576,3.489 -3.552,3.52 -3.537,3.557 -3.532,3.596 -3.532,4.064 -3.537,4.103 -3.552,4.14 -3.576,4.171 -3.913,4.508 -3.913,5.271 -3.493,5.691 2.814,5.691 3.482,5.023 3.482,3.987 3.487,3.948 3.502,3.911 3.526,3.88 4.167,3.239 4.167,-3.366 3.643,-3.89 3.619,-3.921 3.604,-3.958 3.599,-3.997 3.599,-4.589 3.604,-4.628 3.619,-4.665 3.643,-4.696 4.007,-5.06 4.038,-5.084 4.075,-5.099 4.114,-5.104 4.663,-5.104 4.703,-5.099 4.739,-5.084 4.77,-5.06 5.314,-4.516 5.338,-4.485 5.353,-4.449 5.358,-4.409 5.358,2.969 11.156,8.767 11.18,8.798 11.195,8.834 11.2,8.874 11.2,16.889 25.125,16.889
vdd on vdd_gnd (split plane): 10.898,13.271 9.843,12.216 3.429,12.216 3.39,12.211 3.353,12.196 3.322,12.172 -3.536,5.314 -3.56,5.283 -3.575,5.246 -3.58,5.207 -3.58,-5.144 -4.254,-5.818 -4.763,-5.818 -4.929,-5.652 -4.929,-4.826 -4.934,-4.787 -4.949,-4.75 -4.973,-4.719 -5.481,-4.211 -5.512,-4.187 -5.549,-4.172 -5.588,-4.167 -6.604,-4.167 -6.643,-4.172 -6.68,-4.187 -6.711,-4.211 -22.078,-19.578 -22.102,-19.609 -22.117,-19.646 -22.122,-19.685 -22.122,-32.446 -24.954,-32.446 -25.155,-32.245 -25.155,-22.031 -25.155,16.889 10.898,16.889
gnd on vdd_gnd (split plane): 25.125,-20.206 25.125,-32.245 24.924,-32.446 -11.854,-32.446 -12.055,-32.245 -12.055,-25.527 -12.055,-25.523 -12.064,-25.363 -12.091,-25.202 -12.137,-25.045 -12.199,-24.893 -12.279,-24.75 -12.373,-24.617 -12.482,-24.494 -12.605,-24.385 -12.738,-24.291 -12.881,-24.211 -13.033,-24.149 -13.19,-24.103 -13.352,-24.076 -13.515,-24.067 -13.679,-24.076 -13.84,-24.103 -13.997,-24.149 -14.149,-24.211 -14.292,-24.291 -14.425,-24.385 -14.548,-24.494 -14.657,-24.617 -14.751,-24.75 -14.831,-24.893 -14.893,-25.045 -14.939,-25.202 -14.966,-25.363 -14.975,-25.523 -14.975,-25.527 -14.975,-32.245 -15.176,-32.446 -21.82,-32.446 -21.82,-19.748 -6.541,-4.469 -5.651,-4.469 -5.231,-4.889 -5.231,-5.715 -5.226,-5.754 -5.211,-5.791 -5.187,-5.822 -4.933,-6.076 -4.902,-6.1 -4.865,-6.115 -4.826,-6.12 -4.191,-6.12 -4.152,-6.115 -4.115,-6.1 -4.084,-6.076 -3.322,-5.314 -3.298,-5.283 -3.283,-5.246 -3.278,-5.207 -3.278,-3.5 3.5,-3.5 3.5,3.5 -3.278,3.5 -3.278,5.144 3.492,11.914 9.906,11.914 9.945,11.919 9.982,11.934 10.013,11.958 11.156,13.101 11.18,13.132 11.195,13.169 11.2,13.208 11.2,16.889 25.125,16.889

## Other copper
HV_vss (plane layer: these items are gaps in the copper):
  rectangle: -3.5,-3.5 3.5,3.5
  lines w0.3: -24.003,-33.02 -24.003,-22.479 -4.572,-3.048 -4.572,2.707 -3.683,3.596 -3.683,4.064 -4.064,4.445 -4.064,5.334 -3.556,5.842 2.877,5.842 3.633,5.086 3.633,3.987 4.318,3.302 4.318,-3.429 3.75,-3.997 3.75,-4.589 4.114,-4.953 4.663,-4.953 5.207,-4.409 5.207,3.032 11.049,8.874 11.049,17.399 ; -3.302,-32.956 -3.175,-32.829
vdd_gnd (plane layer: these items are gaps in the copper):
  rectangle: -3.5,-3.5 3.5,3.5
  lines w0.3: -21.971,-32.956 -21.971,-19.685 -6.604,-4.318 -5.588,-4.318 -5.08,-4.826 -5.08,-5.715 -4.826,-5.969 -4.191,-5.969 -3.429,-5.207 -3.429,5.207 3.429,12.065 9.906,12.065 11.049,13.208 11.049,17.399

## Silkscreen, mask and mechanical layers (free items; w line width, h text height)
Top Overlay:
  region: 7.722,-24.955 9.501,-25.398 7.667,-25.398 cw(c9.639,-25.415)
  region: 9.058,-23.618 9.501,-25.398 9.501,-23.564 ccw(c9.519,-25.536)
  region: 8.072,-24.249 9.501,-25.398 7.844,-24.612 cw(c9.55,-25.429)
  region: 8.689,-23.754 ccw(c9.473,-25.353) 8.349,-23.971 9.501,-25.398
  region: 44.539,-10.79 27.394,-10.79 27.394,-2.173 44.539,-2.173
  region: 11.881,-25.398 12.379,-25.398 12.379,-23.992 12.729,-23.992 12.729,-23.584 11.531,-23.584 11.531,-23.992 11.881,-23.992 11.881,-24.229
  region: 9.621,-24.69 10.278,-25.396 10.831,-25.396 10.094,-24.495 10.827,-23.582 10.258,-23.582 9.621,-24.286 9.621,-24.69
  region: 11.412,-23.584 10.915,-23.584 10.915,-25.396 11.412,-25.396
  lines w0.15: -2.65,-2.65 2.65,-2.65 2.65,2.65 -2.65,2.65 -2.65,-2.65
  text "HIT chip carrier / Alena's & Horacio's / Jul. 2020 / H. Mateos" at 7.735,-23.119 h1.52
  text "- ADL" at 12.844,-24.995 h1.52
  text "Karlsruhe Institute of Technology" at 7.667,-25.944 h0.39
Bottom Overlay:
  lines w0.1: 1.488,-27.011 1.488,-24.046
Top Solder:
  rectangle: -25.915,-33.206 25.885,-27.231
  region: 5.334,-10.2 -4.837,-10.2 -4.837,-3.975 5.334,-3.975
  region: -4,-6.836 -6.879,-6.836 -6.879,6.35 -4.953,6.35 -4,6.35
  region: 3.925,4.826 10.151,4.826 10.149,-4.699 10.149,-6.955 3.925,-6.955
  region: 10.153,3.925 -2.25,3.925 -6.879,3.925 -6.879,6.895 10.153,6.895
Bottom Solder:
  rectangle: -25.915,-33.206 25.885,-27.231
Mechanical 1:
  lines w0.1: -14.465,-25.527 cw(c-13.515,-25.527) -12.565,-25.527 ; -14.465,-25.506 -14.465,-32.456 -14.965,-32.956 -25.165,-32.956 -25.665,-32.456 -25.665,-22.031 -25.665,17.399 25.635,17.399 25.635,-20.206 25.635,-32.456 25.135,-32.956 -12.065,-32.956 -12.565,-32.456 -12.565,-25.506